# Altium PCB Smart_Plug(Upadated01).PcbDoc
Units mm, origin at the board's own origin, x right, y up, seen from the top; angles counter-clockwise.
Board outline 109.5 x 60 mm, 2 copper layers (Top Layer, Bottom Layer); 23 components, 19 nets, 96 pads, 1 vias.
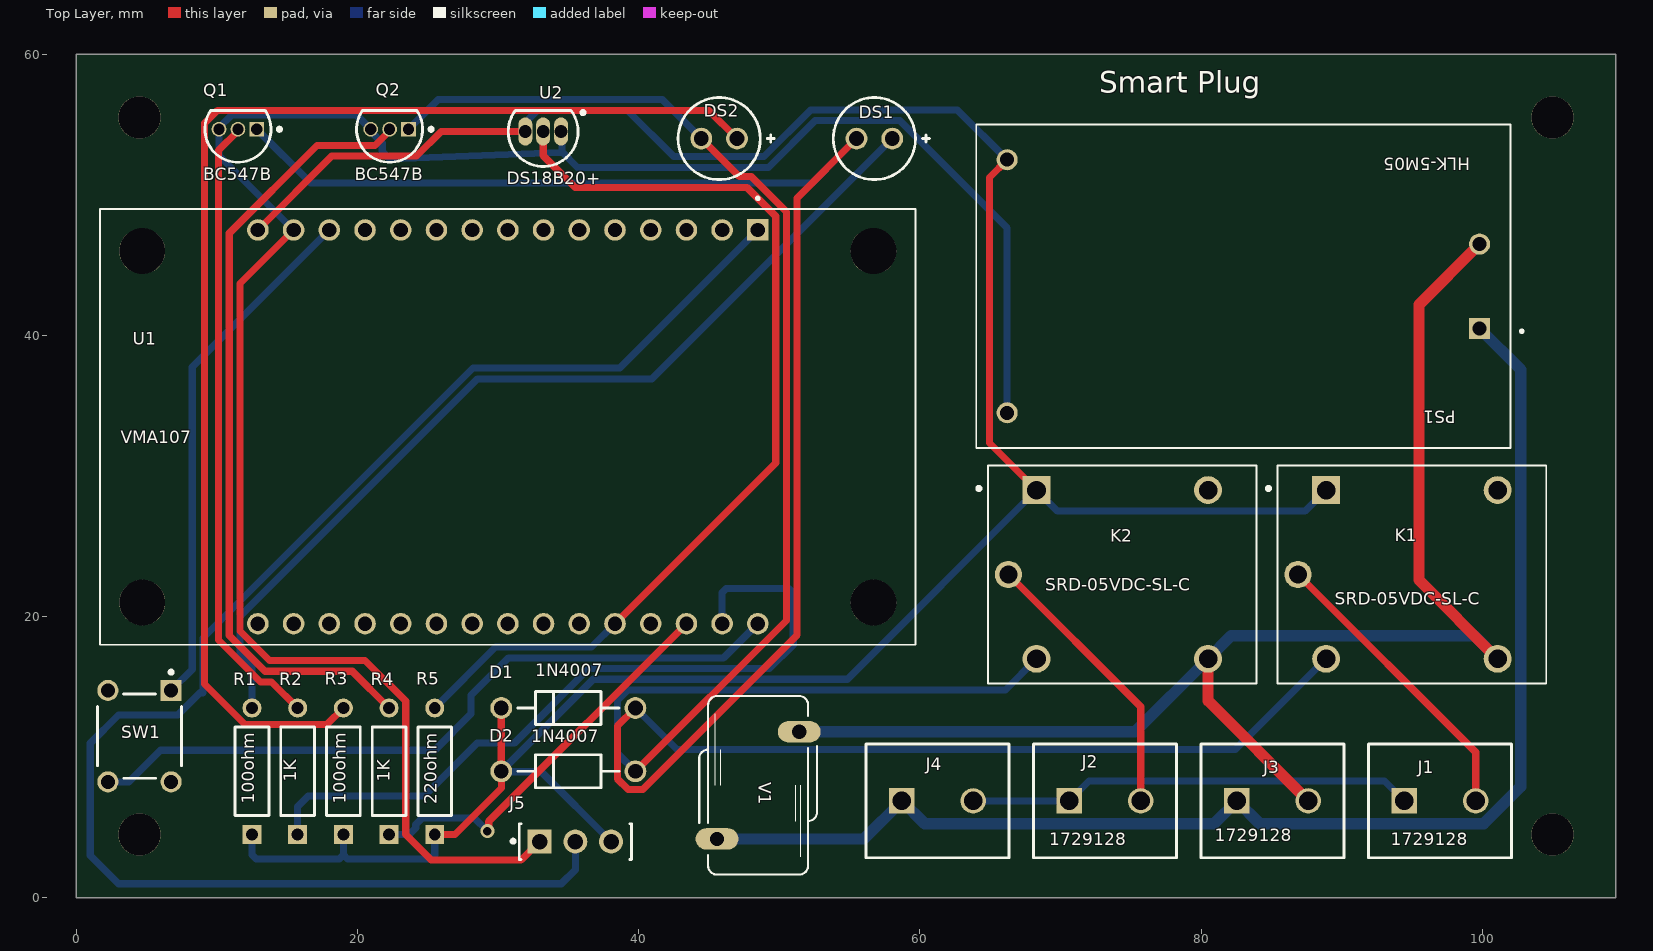
[diagram p0: Top Layer view]
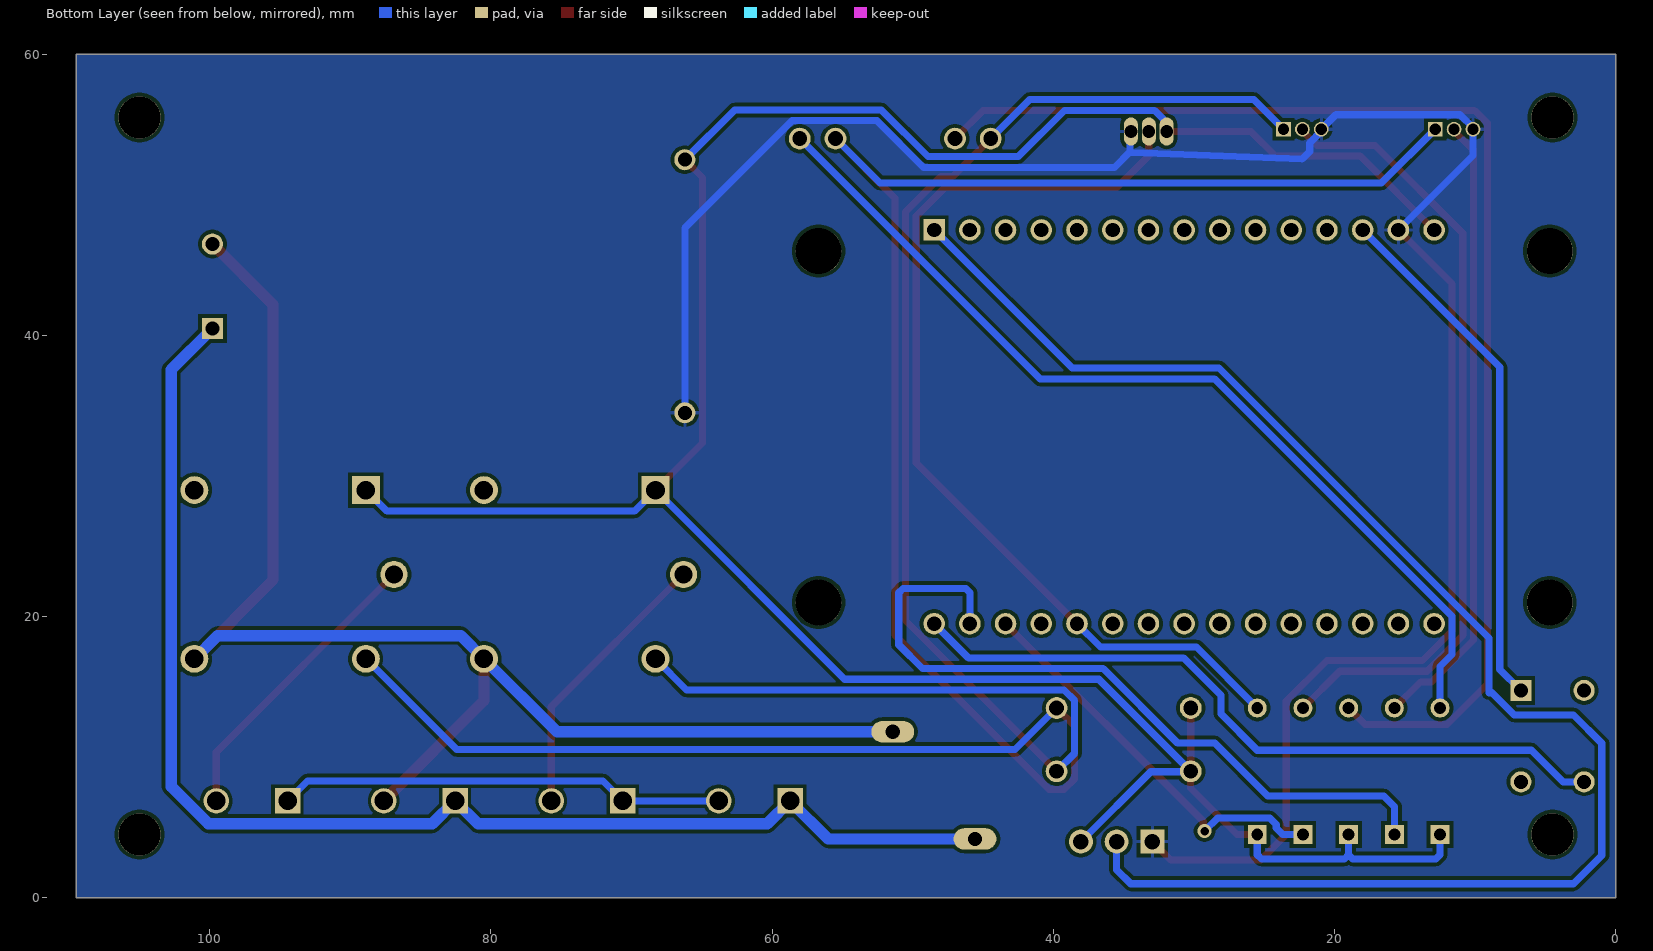
[diagram p1: Bottom Layer view, seen from below]

## Layer stack, top to bottom
Top Solder: solder mask 0.0102, Solder Resist, Dk 3.5
Top Layer: signal copper 0.0356
Dielectric 1: dielectric 0.32, FR-4, Dk 4.8
Bottom Layer: signal copper 0.0356
Bottom Solder: solder mask 0.0102, Solder Resist, Dk 3.5

## Board outline
0,-0.001 109.5,-0.001 109.5,59.999 0,59.999

## Design rules (kind name [scope] priority, off if disabled: settings)
Clearance [All] p1: gap=0.254 ignorepadtopadclearanceinfootprint=FALSE
HoleSize HoleSize_1 [All] p1: absolutevalues=TRUE maxlimit=3.25 minlimit=0.025 maxpercent=80.000 minpercent=20.000
HoleSize [All] p2: absolutevalues=TRUE maxlimit=2.54 minlimit=0.025 maxpercent=80.000 minpercent=20.000
MinimumSolderMaskSliver [All] p1: minsoldermaskwidth=0.017
PolygonConnect [All] p1: connectstyle=Relief reliefconductorwidth=0.254 reliefentries=4 polygonreliefangle="90 Angle" airgapwidth=0.254
RoutingVias [All] p1: holewidth=0.6 width=1 viastyle="Through Hole" minholewidth=0.6 minwidth=1 maxholewidth=0.6 maxwidth=1
SolderMaskExpansion SolderMaskExpansion_3 [HasFootprint('CONV_HLK-5M05')] p1: expansion=0 istentingtop=FALSE
SolderMaskExpansion SolderMaskExpansion_2 [HasFootprint('MODULE_VMA107')] p2: expansion=0 istentingtop=FALSE
SolderMaskExpansion SolderMaskExpansion_1 [HasFootprint('RELAY_SRD-05VDC-SL-C')] p3: expansion=0 istentingtop=FALSE
SolderMaskExpansion [All] p4: expansion=0.102 istentingtop=FALSE
Width Width_Power [(InNet('AC1') OR InNet('AC2'))] p1: maxlimit=2.54 minlimit=0.254 preferedwidth=0.8
Width [All] p2: maxlimit=2.54 minlimit=0.254 preferedwidth=0.508
28 further rules are at their usual default settings.

## Components (designator, comment, footprint, x,y, rotation, side; value= is the part's Value field where it differs from the comment)
D1 "1N4007" ONSC-AXIAL_LEAD-2-59-10_P 35,13.5 r0 top
D2 "1N4007" ONSC-AXIAL_LEAD-2-59-10_P 35,9 r0 top
DS1 "HLMP-3507" AVAG-HLMP-3507 56.77,54 r180 top
DS2 "HLMP-3507" AVAG-HLMP-3507 45.73,54 r180 top
J1 "1729128" PHOE-1729128-2_V 97,6.899 r0 top
J2 "1729128" PHOE-1729128-2_V 73.173,6.899 r0 top
J3 "1729128" PHOE-1729128-2_V 85.087,6.899 r0 top
J4 "1729128" PHOE-1729128-2_V 61.26,6.899 r0 top
J5 "2211S-03G" FP-2211S-03G-MFG 35.5,4 r0 top
K1 "SRD-05VDC-SL-C" RELAY_SRD-05VDC-SL-C 95,22.999 r0 top
K2 "SRD-05VDC-SL-C" RELAY_SRD-05VDC-SL-C 74.4,22.999 r0 top
PS1 "HLK-5M05" CONV_HLK-5M05 83.013,43.499 r180 top
Q1 "BC547B" ONSC-TO-92-3-29-11 11.5,54.665 r180 top
Q2 "BC547B" ONSC-TO-92-3-29-11 22.289,54.665 r180 top
R1 "100ohm" RESA60-630X240 12.5,9 r90 top
R2 "1K" RESA60-630X240 15.75,9 r90 top
R3 "100ohm" RESA60-630X240 19,9 r90 top
R4 "1K" RESA60-630X240 22.25,9 r90 top
R5 "220ohm" RESA60-630X240 25.5,9 r90 top
SW1 "1825910-6" TECO-1825910-6_V 4.5,11.5 r270 top
U1 "VMA107" MODULE_VMA107 30.7,33.5 r270 top
U2 "DS18B20+" Q3+1 33.213,54.5 r90 top
V1 "MOV-10D561K" MOV-10D561 48.5,8 r0 top

## Footprints (in the part's own frame and the unit in brackets; to place one, negate y for a bottom-side part, rotate by r counter-clockwise, add the part's x,y. Pads: shape width x height; smd on the part's side, far side on the other; paste and mask are expansions set on the pad)
AVAG-HLMP-3507 [mm] "THD, 2-Leads, Dia 5.845mm, Pitch 2.54mm"
  round 1.55 hole 1.05: 1(-1.27,0) 2(1.27,0)
  silkscreen extent -3.92,-2.92 2.92,2.92
CONV_HLK-5M05 [mm]
  rect 1.5x1.5 / inner round 1.5 / far side rect 1.5x1.5 hole 1: 1(-16.8,3)
  round 1.5 hole 1: 2(-16.8,-3) 3(16.8,9) 4(16.8,-9)
  silkscreen extent -19.9,-11.5 19,11.5, body extent -19,-11.5 19,11.5, height 23
FP-2211S-03G-MFG [mm]
  rect 1.7x1.7 hole 1.1 paste-1000 mask+0: 1(-2.54,0)
  round 1.7 hole 1.1 paste-1000 mask+0: 2(0,0) 3(2.54,0)
  silkscreen extent -4.55,-1.27 3.98,1.27, body extent -4.09,-1.37 4.09,1.37, height 0.25
MODULE_VMA107 [mm]
  rect 1.53x1.53 hole 1.02: 1(-14,17.78)
  round 1.53 hole 1.02: 2(-14,15.24) 3(-14,12.7) 4(-14,10.16) 5(-14,7.62) 6(-14,5.08) 7(-14,2.54) 8(-14,0) 9(-14,-2.54) 10(-14,-5.08) 11(-14,-7.62) 12(-14,-10.16) 13(-14,-12.7) 14(-14,-15.24) 15(-14,-17.78) 16(14,-17.78) 17(14,-15.24) 18(14,-12.7) 19(14,-10.16) 20(14,-7.62) 21(14,-5.08) 22(14,-2.54) 23(14,0) 24(14,2.54) 25(14,5.08) 26(14,7.62) 27(14,10.16) 28(14,12.7) 29(14,15.24) 30(14,17.78)
  round 3.25 hole 3.25 unplated: ""(-12.5,26) ""(-12.5,-26) ""(12.5,26) ""(12.5,-26)
  silkscreen extent -16.35,-29 15.5,29
MOV-10D561 [mil]
  oval 120x60 hole 40: 1(-115,-150) 2(115,150)
  silkscreen extent -165,-250 165,250, body extent -246,-79 246,79, height 610
ONSC-AXIAL_LEAD-2-59-10_P [mm] "AXIAL, 2-Leads, Diameter 2.35mm"
  round 1.55 hole 1.05: 1(-4.77,0) 2(4.77,0)
  silkscreen extent -3.6,-1.18 3.59,1.18
ONSC-TO-92-3-29-11 [mm] "TO, 3-Leads, Body Dia 4.7mm, Pitch 1.27mm"
  rect 1.05x1.05 hole 0.8: 1(-1.346,0)
  round 1.05 hole 0.8: 2(0,0) 3(1.346,0)
  silkscreen extent -3.08,-1.34 2.35,2.35, body extent -2.35,-1.33 2.36,2.36, height 7.87
PHOE-1729128-2_V [mm] "Receptacle, 2-Leads, Body 8.1x10.16mm, Pitch 5.08mm"
  rect 1.8x1.8 hole 1.3: 1(-2.54,0)
  round 1.8 hole 1.3: 2(2.54,0)
  silkscreen extent -5.08,-4.05 5.08,4.05, body extent -5.65,-4.05 5.08,4.05, height 10.01
Q3+1 [mm] "TO, Flat Index; 3 In-Line, Axial Leads; Body Dia. 4.7mm; Leads 0.56 x 0.51 mm (max)"
  oval 2x1 hole 0.9: 1(0,-1.27) 2(0,0) 3(0,1.27)
  silkscreen extent -2.48,-2.96 1.5,2.48, body extent -2.48,-2.5 1.5,2.5, height 4.96
RELAY_SRD-05VDC-SL-C [mm]
  rect 1.98x1.98 / inner round 1.98 / far side rect 1.98x1.98 hole 1.32: A1(-6.1,6)
  round 1.98 hole 1.32: A2(-6.1,-6) NC(6.1,6) NO(6.1,-6)
  round 1.935 hole 1.29: COM(-8.1,0)
  silkscreen extent -10.3,-7.75 9.55,7.75, body extent -9.6,-7.8 9.6,7.8, height 15.8
RESA60-630X240 [mm] "Axial Resistor, 2-Leads, Dia 2.4mm, Body Length 6.3mm"
  rect 1.35x1.35 hole 0.85: 1(-4.5,0)
  round 1.35 hole 0.85: 2(4.5,0)
  silkscreen extent -3.15,-1.2 3.15,1.2, body extent -3.15,-1.2 3.15,1.2, height 2.4
TECO-1825910-6_V [mm] "Switch, 4-Leads, Body 5.99x5.99mm"
  rect 1.5x1.5 hole 0.99: 1(-3.25,2.25)
  round 1.5 hole 0.99: 2(3.25,2.25) 3(-3.25,-2.25) 4(3.25,-2.25)
  silkscreen extent -4.67,-2.99 3,3, body extent -3,-2.99 2.99,3, height 5

## Part data
D1 D2: library part CMP-0902-00142-1, "Standard Recovery Rectifier, 2-Pin Axial_Lead, Pb-Free, Bulk Bag", Manufacturer="On Semiconductor", ComponentLink1Description="Manufacturer URL", ComponentLink1URL=http://www.onsemi.com/, ComponentLink2Description=Datasheet, ComponentLink2URL=http://www.onsemi.com/pub_link/Collateral/1N4001-D.PDF, ComponentLink3Description="Package Specification", ComponentLink3URL=http://www.onsemi.cn/pub_link/Collateral/59-10.PDF, DatasheetVersion="Rev. 13", IFSM Max (A)=30, IO(rec) Max (A)=1, Mounting Technology="Through Hole", PackageDescription="2-Pin, Axial Lead, Diameter 2.35 mm", PackageReference=AXIAL_LEAD-2-59-10, PackageVersion="Rev. U, 02/2005", Packing="Bulk Bag", PartNumber=1N4007, RoHS=TRUE, Type="Standard Recovery", VRRM Max (V)=1000
DS1 DS2: library part CMP-2000-06412-1, "T-1 3/4 (5 mm) Diffused LED Lamp, Green, 2.1 V, -20 to 100 degC, 2-Pin THD, RoHS, Bulk", Emitting Color=YellowGreen, Forward Current=25mA, Forward Voltage=2.7V, Manufacturer=Avago, Operating Temp Range=-40Cto100C, Operating Temperature Classification=Industrial, Package Description="2-Pin Through Hole Device, Dia 5.845 mm, Pitch 2.54 mm", Package Type=T-13/4, Power Dissipation=85W, Reverse Voltage=5V, Test Current (It)=10mA, Chip Material=GaP, Datasheet URL=http://docs.avagotech.com/docs/AV02-1558EN, Datasheet Version=03/2015, DELETED=Compliant, Dominant Wave Length=569nm, High Brightness=No, Lens Dimensions=5.08x5.08x8.3mm, Lens Type=ColoredDiffused, Lum Intensity=4.2mcd, Luminous Intensity=4.2mcd, Main Category=StandardLED, Manufacturer URL=http://www.avagotech.com/, Mounting=ThroughHole, Mounting Technology=ThroughHole, Number of  Elements=1, Package Reference=HLMP-3507, Peak Wavelength=565nm, Pin Count=2, Product Depth (mm)=6.1mm, Product Height (mm)=9.19mm, Product Length (mm)=6.1mm, Rad Hardened=No, Shape Type=Circular, Type=Uni-Color, Viewing Angle=60deg
J1 J2 J3 J4: library part CMP-2000-05815-1, "PCB Terminal Block, 13.5 A, 400 V, 2-Pin THD, RoHS, Bulk", Current Rating=13500mA, Manufacturer="Phoenix Contact", Package Description="2-Pin Through Hole Device, Body 8.1 x 10.16 mm, Pitch 5.08 mm", Package Reference=1729128-2, Package Version=03/2015, Voltage Rating=400V, Datasheet URL=https://datasheet.ciiva.com/16046/1729128-16046181.pdf, Datasheet Version=12/2013, Manufacturer URL=http://www.phoenixcontact.com/, Mounting Technology=ThroughHole, No. of Positions=2, No. of Rows=1, Orientation=Horizontal, Package URL=https://www.phoenixcontact.com/online/portal/pi/pxc/product_detail_page/!ut/p/b1/3VdJjqNKFDxLH8AFycySyWY2ozFsEPOMMQaDOX1XedGL_1Vdm5YXJleknhSKeBkvI6EA8ncAo3AYoDhBQGco6KN7VURTdemj9us_IEKEZo_YHiPAEWEFmDGOHMORkqKYCORBZxgL7ZoaZYcbFFUZ3fqxSY6GOuxydWUuHqz1ynmMFygu583Bob0Ewr6Sd_l-5m-kAueHiB0jpRwZwe58wwtkpxtMYd_LmGcDRU02dRNEyWt6Y2ti5pSyJ_reIkzIulrqApdnbT11V5jnCKbYNCvhEM1MCpPByat_X379-iThf08CI5GfOPqfBeS3BRoBOdD55AKVv0iLwCMq-2BrzXWSGRH7pUGD9uwXQjiph3xL0DKQwdGa0JImiIOmBNOestqgwTHSSs2oOep-78apyXQBvNi8ZLaFjvjWvcaUEBu0MC6Wbe-d6mB0FAebo2lUWinqYaZs5DAYzV0RP9yitUjnGJ0iI9xhZkT42OCQNUJJhkgWINNQLP2JFP6OpMg3JCVg70jqHT0lvKOnhHf0lPuOnnLf0VPuWx6_dxwUIvwk5WMkT0kLL1mh61l2yZVSzG3pYV_bqo-mj6uMKwKwdnnW8Jh5RTOJzMOA5c-eJDaZQw4mTMPH02PvS_ZAqNVjVTo2WyYLkwH_KU1mmmG5kjRhDqPXLwwVHvVOjCM60-fpXvTDfMGW1PVFVS1r4e4yVDk4ZdNbkUHvqPqQSeian4UD39fNKmachqdJ1NJbyk8rXT9mXTvPk3oE5meulKGgiruPJek-4I9hTT6G8ZLOyRSm2RRVbThERQad5OS28hdt4YW4vG0stgYYzsWsK4_7y6DZMjJSCqri1kyiZR5vD7pwIrNR7QwPHTcLTI5qT7eRlpHrdGiupYlqQDJ7zy_CND8fWWBoLRXxk1RVcXiBQwbTD4Xi7KL-FuO94t9xaqweXzH, Packing=Bulk, PartNumber=1729128, Pitch=5.08mm, RoHS=TRUE
J5: library part CMP-12414-000004-1, "Board-To-Board Connector, Vertical, 2.54 mm, 3 Contacts, Header, 2211S Series, Through Hole, 1 Rows", Flammability Rating="UL94 V-0", Insulation Resistance=1GR, Contact Material="Copper Alloy", Contact Plating=Gold, Gender=Male, Height=0.47inch, Length=0.31inch, Mount="Through Hole", Number of Contacts=3, Number of Rows=1, REACH SVHC="No SVHC", Termination="Through Hole", Weight=0.11lb, Width=0.12inch
K1 K2: "5V Trigger Relay Module For Arduino And Raspberry Pi 5V Trigger Relay Module For Arduino And Raspberry Pi", Package="NON STANDARD-5 Songle Relay", Availability="Not in stock", Check_prices=https://www.snapeda.com/parts/SRD-05VDC-SL-C/Songle+Relay/view-part/?ref=eda, MF="Songle Relay", MP=SRD-05VDC-SL-C, Price=None, SnapEDA_Link=https://www.snapeda.com/parts/SRD-05VDC-SL-C/Songle+Relay/view-part/?ref=snap
PS1: "AC DC 220V to 5V 5W 5Watt Isolated Switching Step-Down Power Supply Module Converter", Package=Package, Availability="Not in stock", Check_prices=https://www.snapeda.com/parts/HLK-5M05/Hi-link/view-part/?ref=eda, MF=Hi-link, MP=HLK-5M05, Price=None, SnapEDA_Link=https://www.snapeda.com/parts/HLK-5M05/Hi-link/view-part/?ref=snap
Q1 Q2: library part CMP-1048-01467-1, "Amplifier Transistor, NPN Silicon, 3-Pin TO-92, Bulk Box", Manufacturer="On Semiconductor", ComponentLink1Description="Manufacturer URL", ComponentLink1URL=http://www.onsemi.com/, ComponentLink2Description=Datasheet, ComponentLink2URL=http://www.onsemi.com/pub_link/Collateral/BC546-D.PDF, ComponentLink3Description="Package Specification", ComponentLink3URL=http://www.onsemi.cn/pub_link/Collateral/2N6426-D.PDF, DatasheetVersion="Rev. 7", fT Min (MHz)=150, IC Continuous (A)=0.1, Mounting Technology="Through Hole", PackageDescription="3-Pin Transistor Outline, Body 4.825 x 3.685 mm, Pitch 1.27 mm", PackageReference=TO-92-3-29-11_AM_SL, PackageVersion="Rev. AM", Packing="Bulk Box", PartNumber=BC547B, Polarity=NPN, RoHS=FALSE
R1 R2 R3 R4 R5: library part CMP-1659-00073-1, "Axial Resistor, 100 KOhm, +/- 1%, 0.25 W, -55 to 155 degC, 2-Pin THD, RoHS, Bulk", Case\Package=Axial, Max Operating Temperature="155 degC", Min Operating Temperature="-55 degC", Package Quantity=200, Power Rating="250 mW", Resistance="475 Ohm", Tolerance=1%, Voltage Rating="250 V", ComponentLink1Description="Manufacturer URL", ComponentLink1URL=http://www.yageo.com/, ComponentLink2Description=Datasheet, ComponentLink2URL=http://www.yageo.com/documents/recent/Yageo%20LR_MFR_2013.pdf, DatasheetVersion=Apr-13, Length="0.248 inch", Mount="Through Hole", PackageDescription="2-Pin Axial Lead, Dia 2.4 mm, Body Length 6.3 mm", PackageReference=MFR-25, Packaging=Bulk, RoHSCompliant=true
SW1: library part CMP-1684-00021-1, "Tact Switch, SPST-NO, 0.05 A, -35 to 85 degC, 4-Pin THD, RoHS, Bulk", Actuator Color=Black, Contact Rating @ Voltage=0.05A@24VDC, Dielectric Strength=500VAC, Manufacturer="TE Connectivity", Maximum AC Voltage Rating=N/A, Maximum Contact Resistance=100mOhm, Maximum DC Voltage Rating=24V, Minimum Insulation Resistance=100MOhm, Operating Temperature=-35to85C, Package Description="4-Pin Through Hole Device, Body 5.99 x 5.99 mm, Pitch 6.5 mm", Package Reference=THD, Actuator Length=1.4mm, Actuator Material=PolybutyleneTerephthalate, Actuator Style=RoundButton, Base Material=N/A, Body Orientation=Straight, Bushing Type=Unthreaded, Contact Material=CopperAlloy, Contact Plating=Silver, Datasheet URL=http://www.te.com/commerce/DocumentDelivery/DDEController?Action=showdoc&DocId=Customer+Drawing%7F1825910%7FC9%7Fpdf%7FEnglish%7FENG_CD_1825910_C9.pdf%7F1825910-6, Datasheet Version="Rev. C9", Dimension=5.99x5mm, Electrical Life=100000Cycles, Family=1825910, Function=MomentaryContact, Housing Material=N/A, Illumination=N/R, Manufacturer URL=http://www.te.com, Mechanical Life=100000Cycles, Mounting=ThroughHole, Packaging=N/A, Part No=1825910-6, Pole Throw Configuration=SPST, Product Weight=N/A, RoHS=Yes, Seal Description=N/A, Seal Location=N/A, Switch Configuration=OFF(ON), Terminal Type=PCPins, Thread Size=N/R
U1: "NodeMCU V2 Lua Based ESP8266 Development Board", Package=None, Availability="Not in stock", Check_prices=https://www.snapeda.com/parts/VMA107/Velleman/view-part/?ref=eda, MF=Velleman, MP=VMA107, Price=None, SnapEDA_Link=https://www.snapeda.com/parts/VMA107/Velleman/view-part/?ref=snap
U2: library part CMP-0253-00003-1, "Programmable Resolution Digital Thermometer, 1-Wire Interface, ±0.5°C Accuracy, 3-Pin TO92, -55°C to +125°C, Pb-Free", Code_JEDEC=TO-226-AA, ComponentLink1Description="Manufacturer URL", ComponentLink1URL=http://www.maxim-ic.com, ComponentLink2Description=Datasheet, ComponentLink2URL=http://datasheets.maxim-ic.com/en/ds/DS18B20.pdf, DatasheetVersion=2007, PackageDescription="TO-92 Package, Body Dia. 4.7mm; Leads 0.51 x 0.51 mm (max), Pb-Free", PackageReference=Q3+1, PackageVersion="revB, 2009"
V1: "560 V 2.5 kA Varistor 1 Circuit Through Hole Disc 10mm", Package="Disc-10 Bourns", Availability="In Stock", Check_prices=https://www.snapeda.com/parts/MOV-10D561K/Bourns/view-part/?ref=eda, MF=Bourns, MP=MOV-10D561K, Price=None, Purchase-URL=https://pricing.snapeda.com/search/part/MOV-10D561K/?ref=eda, SnapEDA_Link=https://www.snapeda.com/parts/MOV-10D561K/Bourns/view-part/?ref=snap

## Free pads (board coordinates)
  round 3 hole 3: 20(4.5,4.5) 20(4.5,55.5) 20(105,4.5) 20(105,55.499)

## Via types
v1: diameter 1, hole 0.6, Top Layer to Bottom Layer, 1 vias

## Nets (pads, with @x,y where several pads share a name; then routed paths per layer and width w, separated by ;. In a path a pad name is that pad's centre, name@x,y a point inside that pad or via, vN(x,y) a via of type N, cw(c..) or ccw(c..) an arc to the next point about the centre after c; other vN are vias at no path point)
A0: J5.2 U1.1 | length 110.6
  Bottom Layer w0.508: J5.2 35.5,2 34.5,1 3,1 0.992,3.008 0.992,10.992 3,13 7.219,13 8.808,14.59 9.012,14.59 9.012,18.47 28.218,37.676 38.656,37.676 U1.1
AC1: J3.1 J4.1 PS1.1 V1.1 | length 95.2
  Bottom Layer w0.8: V1.1 56.011,4.19 J4.1 60.351,5.267 80.915,5.267 J3.1 84.178,5.267 100.106,5.267 102.744,7.905 102.744,37.568 PS1.1
AC2: J3.2 K1.NO K2.NO PS1.2 V1.2 | length 99.8
  Top Layer w0.8: K2.NO 80.5,14.025 J3.2 ; PS1.2 95.5,42.185 95.5,22.599 K1.NO
  Bottom Layer w0.8: V1.2 75.311,11.81 K2.NO 82.144,18.643 99.456,18.643 K1.NO
AC3: J1.1 J2.1 J4.2 | length 31.8
  Bottom Layer w0.508: J4.2 67.192,6.899 ; 67.192,6.899 J2.1 72.041,8.307 93.052,8.307 J1.1
D0: SW1.4 U1.30 | length 51.7
  Bottom Layer w0.508: SW1.4 3.75,8.25 6,10.5 25.5,10.5 28.086,13.086 28.086,14.414 30.742,17.069 46.049,17.069 U1.30
D1: R2.1 U1.29 | length 53.2
  Bottom Layer w0.508: R2.1 15.75,6.5 16.5,7.25 24.75,7.25 28.5,11 31.152,11 36.459,16.307 49.307,16.307 51,18 51,21.702 50.702,22 46.238,22 45.94,21.702 U1.29
D2: R4.1 U1.28 | length 28.6
  Top Layer w0.508: v1(29.247,4.747) 29.341,4.841 29.341,5.441 U1.28
  Bottom Layer w0.508: R4.1 23.687,4.5 24.151,4.964 24.151,5.219 24.615,5.683 28.31,5.683 v1(29.247,4.747)
D4: R5.2 U1.26 U2.2 | length 69.1
  Top Layer w0.508: U2.2 33.213,52.787 35.466,50.534 47.695,50.534 49.753,48.475 49.753,30.933 U1.26
  Bottom Layer w0.508: R5.2 29.831,17.831 36.651,17.831 U1.26
GND: J5.1 PS1.3 Q1.3 Q2.3 U1.14 U2.1 | length 151.6
  Top Layer w0.508: U1.14 11.647,43.687 11.647,18.973 13.743,16.876 20.547,16.876 23.433,13.99 23.433,4.498 25.246,2.686 31.646,2.686 J5.1
  Bottom Layer w0.508: U1.14 10.154,52.806 10.154,54.779 11.072,55.698 19.91,55.698 Q2.3 20.943,54.518 21.765,53.696 21.765,53.088 22.304,52.549 34.483,53.007 34.54,53.064 ; U2.1 34.54,54.443 34.54,53.064 ; PS1.3 66.213,47.641 58.571,55.283 52.557,55.283 49.229,51.955 35.649,51.955 34.54,53.064
NetD1_2: D1.2 DS1.2 K1.A2 Q1.1 | length 158.8
  Top Layer w0.508: D1.2 38.487,12.217 38.487,8.469 39.239,7.717 40.301,7.717 51.277,18.693 51.277,49.777 DS1.2
  Bottom Layer w0.508: Q1.1 16.676,50.835 52.335,50.835 DS1.2 ; D1.2 42.73,10.54 82.441,10.54 K1.A2
NetD2_2: D2.2 DS2.2 K2.A2 Q2.1 | length 111.9
  Top Layer w0.508: D2.2 39.78,9 50.515,19.735 50.515,48.791 48.01,51.296 47.164,51.296 DS2.2
  Bottom Layer w0.508: Q2.1 25.741,56.77 41.69,56.77 DS2.2 ; D2.2 38.487,10.283 38.487,14.031 39.239,14.783 66.084,14.783 K2.A2
NetDS1_1: DS1.1 R1.2 | length 67.3
  Bottom Layer w0.508: R1.2 12.5,16.451 11.647,17.304 11.647,20.027 28.534,36.914 40.954,36.914 DS1.1
NetDS2_1: DS2.1 R3.2 | length 90.5
  Top Layer w0.508: R3.2 17.817,12.317 12.01,12.317 9.121,15.206 9.121,55.092 10.036,56.008 44.992,56.008 DS2.1
NetQ1_2: Q1.2 R2.2 | length 44.5
  Top Layer w0.508: Q1.2 11.5,54.55 10.123,53.173 10.123,18.341 13.112,15.352 13.898,15.352 R2.2
NetQ2_2: Q2.2 R4.2 | length 56.6
  Top Layer w0.508: R4.2 19.636,16.114 13.428,16.114 10.885,18.657 10.885,47.265 17.134,53.515 21.254,53.515 22.289,54.55 Q2.2
P1: J1.2 K1.COM | length 21.3
  Top Layer w0.508: K1.COM 99.54,10.359 J1.2
P2: J2.2 K2.COM | length 20
  Top Layer w0.508: K2.COM 75.713,13.585 J2.2
RST: SW1.1 U1.13 | length 37.4
  Bottom Layer w0.508: SW1.1 8.25,16.25 8.25,37.75 U1.13
Vin: D1.1 D2.1 J5.3 K1.A1 K2.A1 PS1.4 R1.1 R3.1 R5.1 U1.15 U2.3 | length 194.5
  Top Layer w0.508: U1.15 18.173,52.753 24.206,52.753 25.959,54.505 31.938,54.505 U2.3 ; R5.1 26.937,4.5 30.255,7.818 30.255,8.975 D2.1 D1.1 ; PS1.4 64.955,51.241 64.955,32.343 K2.A1
  Bottom Layer w0.508: R1.1 12.5,3.063 12.798,2.765 18.702,2.765 19,3.063 ; R3.1 19,3.063 ; R5.1 25.5,3.063 25.202,2.765 19.298,2.765 19,3.063 ; D2.1 30.512,9 30.512,9.282 36.775,15.545 54.846,15.545 K2.A1 69.798,27.501 87.402,27.501 K1.A1 ; D2.1@30.429,8.801 30.594,8.966 33.074,8.966 J5.3 ; U2.3 31.943,55.133 32.205,55.395 32.205,55.418 32.795,56.008 39.209,56.008 42.5,52.717 48.913,52.717 52.241,56.045 62.667,56.045 PS1.4
pads on no net: K1.NC K2.NC SW1.2 SW1.3 U1. U1.2 U1.3 U1.4 U1.5 U1.6 U1.7 U1.8 U1.9 U1.10 U1.11 U1.12 U1.16 U1.17 U1.18 U1.19 U1.20 U1.21 U1.22 U1.23 U1.24 U1.25 U1.27

## Polygon pours and split planes (outlines as drawn)
GND on Bottom Layer "GND_L02_P000" (solid, pour order 0): 0,60.001 0,-0.001 109.5,-0.001 109.5,60.001

## Silkscreen, mask and mechanical layers (free items; w line width, h text height)
Top Overlay:
  text "Smart Plug" at 72.754,57.262 h1.52